# EAGLE board DoorSensor-v1.0.Tiled (EAGLE 7.0.0)
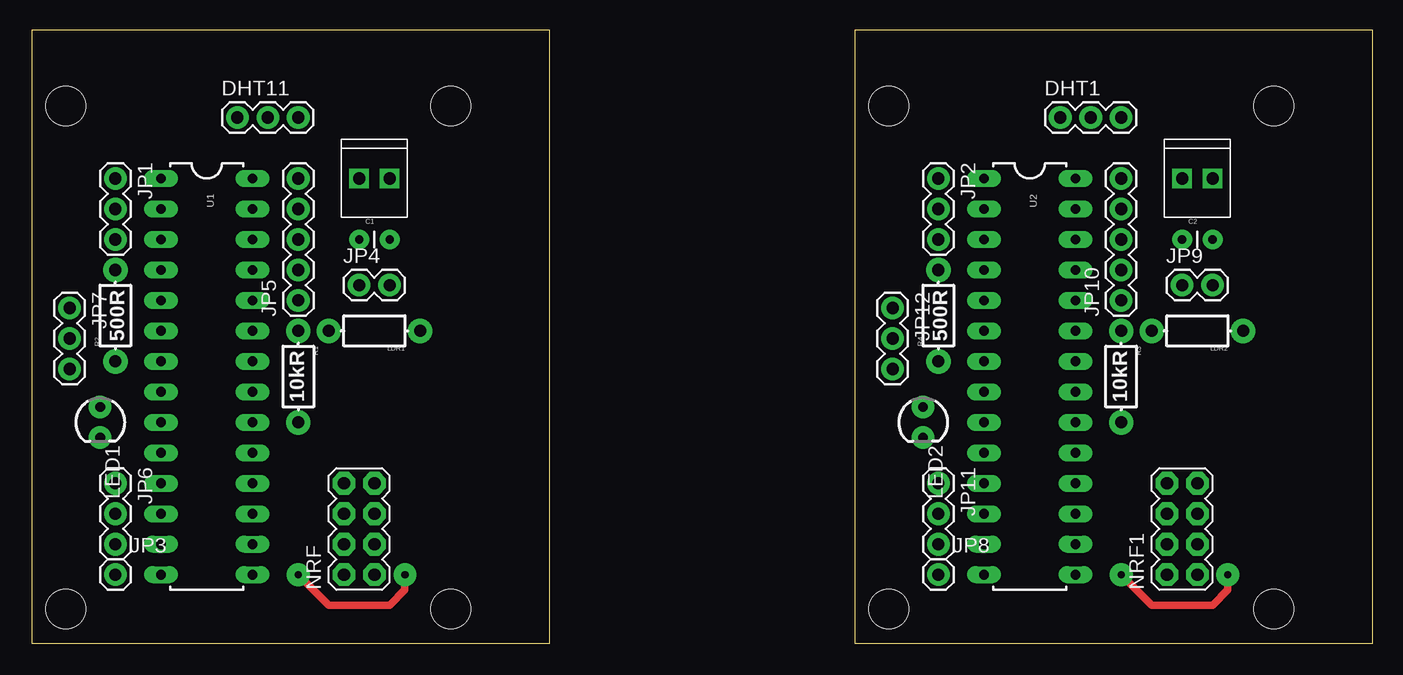
[diagram p0: board, top side]
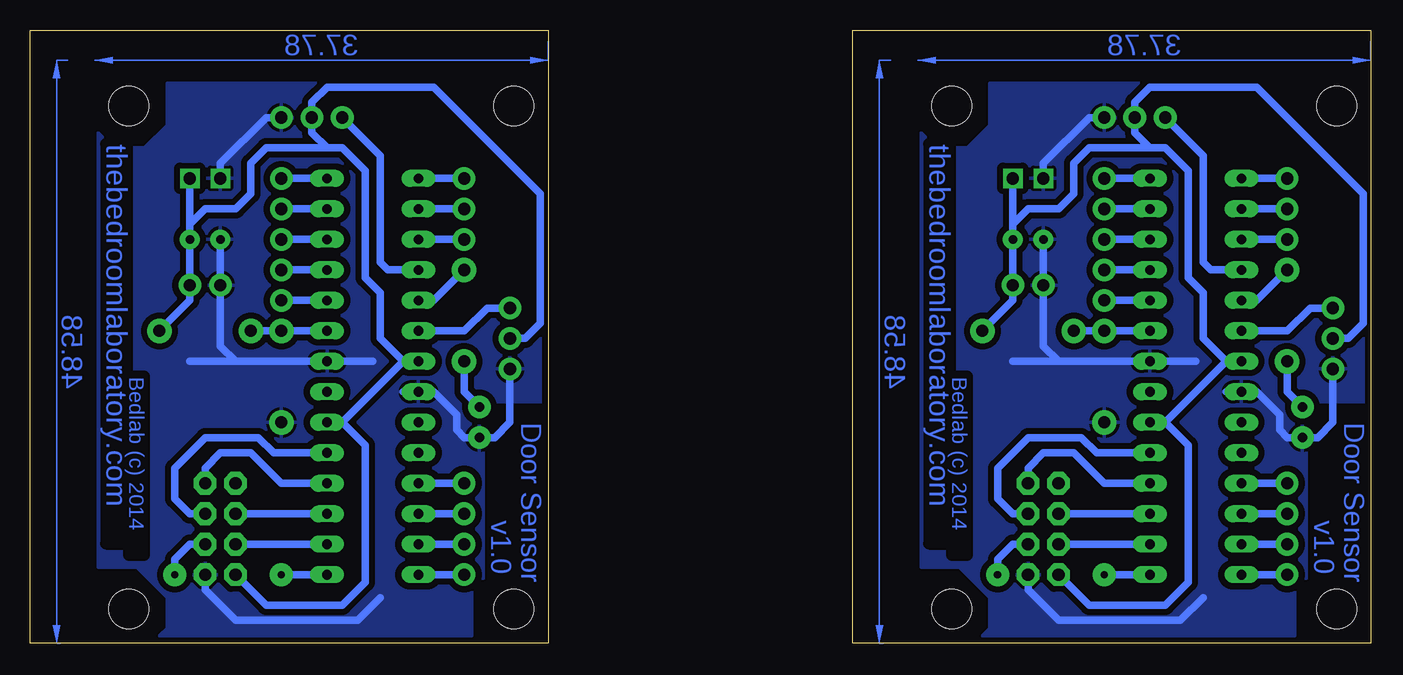
[diagram p1: board, bottom side, seen from below]

Size 111.75 x 51.11 mm. Coordinates in mm from the lower left corner, seen from the top.
Outline: 0,0 43.17,0 43.17,51.11 0,51.11 0,0
Outline: 68.58,0 111.75,0 111.75,51.11 68.58,51.11 68.58,0
Copper layers (1*16): Top 0.035mm / dielectric 1.5mm / Bottom 0.035mm
Design rules "SparkFun-Home": minimum track width 24mil, minimum drill 20mil, track to track 20mil, track to pad 20mil, pad to pad 20mil, via to via 20mil, smd to smd 8mil, copper to edge 10mil, drill to drill 8mil, minimum pad ring 12mil, minimum via ring 10mil, stop-mask expansion 4mil, vias tented up to drill 25mil, thermal gap 10mil

## Footprints (pad centres in the part's own frame; a part is rotated, then mirrored left to right if it is on the bottom)
CAP-PTH-SMALL = drill 0.7 pad 1.651: 1 0,0; 2 2.54,0
1X03 = drill 1.016 pad 1.88: 1 0,0; 2 2.54,0; 3 5.08,0
1X01 = drill 1.016 pad 1.88: 1 0,0
1X02 = drill 1.016 pad 1.88: 1 0,0; 2 2.54,0
1X05 = drill 1.016 pad 1.88: 1 0,0; 2 2.54,0; 3 5.08,0; 4 7.62,0; 5 10.16,0
AXIAL-0.3-KIT = drill 1.016 pad 2.032: P$1 -3.81,0; P$2 3.81,0
LED3MM = drill 0.813 pad 1.88: A -1.27,0; K 1.27,0
2X4 = drill 1.016 pad 1.88 octagon: 1 -3.81,-1.27; 2 -3.81,1.27; 3 -1.27,-1.27; 4 -1.27,1.27; 5 1.27,-1.27; 6 1.27,1.27; 7 3.81,-1.27; 8 3.81,1.27
1X02_2.54_SCREWTERM = drill 1.016 square: P1 2.54,0; P2 0,0
DIL28-3 = drill 0.813 long: 1 -16.51,-3.81; 2 -13.97,-3.81; 3 -11.43,-3.81; 4 -8.89,-3.81; 5 -6.35,-3.81; 6 -3.81,-3.81; 7 -1.27,-3.81; 8 1.27,-3.81; 9 3.81,-3.81; 10 6.35,-3.81; 11 8.89,-3.81; 12 11.43,-3.81; 13 13.97,-3.81; 14 16.51,-3.81; 15 16.51,3.81; 16 13.97,3.81; 17 11.43,3.81; 18 8.89,3.81; 19 6.35,3.81; 20 3.81,3.81; 21 1.27,3.81; 22 -1.27,3.81; 23 -3.81,3.81; 24 -6.35,3.81; 25 -8.89,3.81; 26 -11.43,3.81; 27 -13.97,3.81; 28 -16.51,3.81
STAND-OFF = hole 3.302: 0,0

## Placement (x,y rotation side)
C1  1uF  [CAP-PTH-SMALL]  27.3,33.66 0 top
C2  1uF  [CAP-PTH-SMALL]  95.89,33.66 0 top
DHT1  [1X03]  85.72,43.81 0 top
DHT11  [1X03]  17.14,43.81 0 top
JP1  [1X03]  6.99,38.73 270 top
JP2  [1X03]  75.56,38.73 270 top
JP3  M01PTH  [1X01]  6.99,5.71 0 top
JP4  M02PTH  [1X02]  27.3,29.84 0 top
JP5  [1X05]  22.23,28.57 90 top
JP6  [1X03]  6.99,13.34 270 top
JP7  [1X03]  3.17,27.94 270 top
JP8  M01PTH  [1X01]  75.56,5.71 0 top
JP9  M02PTH  [1X02]  95.89,29.84 0 top
JP10  [1X05]  90.81,28.57 90 top
JP11  [1X03]  75.56,13.34 270 top
JP12  [1X03]  71.75,27.94 270 top
LDR1  [AXIAL-0.3-KIT]  28.57,26.04 180 top
LDR2  [AXIAL-0.3-KIT]  97.16,26.04 180 top
LED1  [LED3MM]  5.71,18.41 270 top
LED2  [LED3MM]  74.3,18.41 270 top
NRF  M04X2  [2X4]  27.3,9.53 90 top
NRF1  M04X2  [2X4]  95.89,9.53 90 top
POWER  M022.54MM_SCREWTERM  [1X02_2.54_SCREWTERM]  27.3,38.73 0 top
POWER1  M022.54MM_SCREWTERM  [1X02_2.54_SCREWTERM]  95.89,38.73 0 top
R1  10kR  [AXIAL-0.3-KIT]  22.23,22.23 270 top
R2  500R  [AXIAL-0.3-KIT]  6.99,27.3 90 top
R3  10kR  [AXIAL-0.3-KIT]  90.81,22.23 270 top
R4  500R  [AXIAL-0.3-KIT]  75.56,27.3 90 top
U1  ATMEGA328P_PDIP  [DIL28-3]  14.61,22.23 270 top
U2  ATMEGA328P_PDIP  [DIL28-3]  83.19,22.23 270 top
U$1  [STAND-OFF]  34.92,44.77 0 top
U$2  [STAND-OFF]  2.86,44.77 0 top
U$3  [STAND-OFF]  2.86,2.86 0 top
U$4  [STAND-OFF]  34.92,2.86 0 top
U$5  [STAND-OFF]  103.5,44.77 0 top
U$6  [STAND-OFF]  71.44,44.77 0 top
U$7  [STAND-OFF]  71.44,2.86 0 top
U$8  [STAND-OFF]  103.5,2.86 0 top

## Library data of the parts
C1 C2 LDR1 LDR2 R1-R4 = SparkFun-Passives
DHT1 DHT11 JP1-JP12 NRF NRF1 POWER POWER1 = SparkFun-Connectors
LED1 LED2 = SparkFun-LED
U1 U2 = SparkFun-DigitalIC
U$1-U$8 = SparkFun-Electromechanical

## Nets
A1: JP5.1 U1.24
A2: JP5.2 U1.25
A3: JP5.3 U1.26
A4: JP5.4 U1.27
A5: JP5.5 U1.28
A6: JP10.1 U2.24
A7: JP10.2 U2.25
A8: JP10.3 U2.26
A9: JP10.4 U2.27
A10: JP10.5 U2.28
D1: JP8.1 U2.14
D2: JP12.1 U2.6
D3: JP11.1 U2.11
D4: JP7.1 U1.6
D5: JP6.1 U1.11
D6: JP6.2 U1.12
D7: JP6.3 U1.13
D8: JP3.1 U1.14
D9: JP11.2 U2.12
D10: JP11.3 U2.13
GND: C1.1 DHT11.3 JP4.1 JP7.3 LED1.K NRF.1 POWER.P2 R1.P$2 U1.8 U1.22
GND1: C2.1 DHT1.3 JP9.1 JP12.3 LED2.K NRF1.1 POWER1.P2 R3.P$2 U2.8 U2.22
N$1: LDR1.P$2 R1.P$1 U1.23
N$2: LED1.A R2.P$1
N$3: DHT11.1 U1.4
N$4: R2.P$2 U1.5
N$5: NRF.3 U1.15
N$6: NRF.4 U1.16
N$7: NRF.5 U1.19
N$8: LDR2.P$2 R3.P$1 U2.23
N$9: NRF.7 U1.18
N$10: NRF.6 U1.17
N$11: LED2.A R4.P$1
N$12: R4.P$2 U2.5
N$13: NRF1.3 U2.15
N$14: NRF1.4 U2.16
N$15: NRF1.5 U2.19
N$16: NRF1.7 U2.18
N$17: NRF1.6 U2.17
N$18: DHT1.1 U2.4
RESET: JP1.1 U1.1
RESET1: JP2.1 U2.1
RX: JP1.2 U1.2
RX1: JP2.2 U2.2
TX: JP1.3 U1.3
TX1: JP2.3 U2.3
VCC: C1.2 DHT11.2 JP4.2 JP7.2 LDR1.P$1 NRF.2 POWER.P1 U1.7 U1.20
VCC1: C2.2 DHT1.2 JP9.2 JP12.2 LDR2.P$1 NRF1.2 POWER1.P1 U2.7 U2.20

## Tracks (layer width: path | path; a pad name or v marks a point on that pad's centre or on a via)
A1
  Bottom 0.61: U1.24 JP5.1
A2
  Bottom 0.61: U1.25 JP5.2
A3
  Bottom 0.61: U1.26 JP5.3
A4
  Bottom 0.61: U1.27 JP5.4
A5
  Bottom 0.61: U1.28 JP5.5
A6
  Bottom 0.61: U2.24 JP10.1
A7
  Bottom 0.61: U2.25 JP10.2
A8
  Bottom 0.61: U2.26 JP10.3
A9
  Bottom 0.61: U2.27 JP10.4
A10
  Bottom 0.61: U2.28 JP10.5
D1
  Bottom 0.61: JP8.1 U2.14
D2
  Bottom 0.61: JP12.1 73.66,27.94 75.56,26.04 U2.6
D3
  Bottom 0.61: JP11.1 U2.11
D4
  Bottom 0.61: JP7.1 5.08,27.94 6.99,26.04 U1.6
D5
  Bottom 0.61: JP6.1 U1.11
D6
  Bottom 0.61: JP6.2 U1.12
D7
  Bottom 0.61: JP6.3 U1.13
D8
  Bottom 0.61: JP3.1 U1.14
D9
  Bottom 0.61: JP11.2 U2.12
D10
  Bottom 0.61: JP11.3 U2.13
GND
  Bottom 0.61: C1.1 JP4.1 27.3,24.77 26.04,23.5 | 26.04,23.5 U1.22 14.61,23.5 | 29.84,23.5 26.04,23.5 | POWER.P2 27.3,40.01 23.5,43.81 DHT11.3 | 13.97,3.81 15.88,1.91 26.04,1.91 28.57,4.45 NRF.1 | 12.06,20.95 U1.8 9.53,20.95 7.62,19.05 7.62,17.78 6.99,17.14 LED1.K 4.45,17.14 3.17,18.41 JP7.3
  pour Bottom: 5.71,46.67 6.35,46.35 6.35,43.81 3.81,41.27 0.64,41.27 0.64,5.71 1.27,6.35 4.45,6.35 6.35,4.45 6.35,0.64 32.38,0.64 31.75,1.27 31.75,3.81 34.29,6.35 37.47,6.35 37.47,42.55 36.2,41.27 33.66,41.27 31.75,43.18 31.75,46.67
GND1
  Bottom 0.61: C2.1 JP9.1 95.89,24.77 94.61,23.5 | 94.61,23.5 U2.22 83.19,23.5 | 98.42,23.5 94.61,23.5 | POWER1.P2 95.89,40.01 92.08,43.81 DHT1.3 | 82.55,3.81 84.45,1.91 94.61,1.91 97.16,4.45 NRF1.1 | 80.64,20.95 U2.8 78.11,20.95 76.2,19.05 76.2,17.78 75.56,17.14 LED2.K 73.03,17.14 71.75,18.41 JP12.3
  pour Bottom: 74.3,46.67 74.93,46.35 74.93,43.81 72.39,41.27 69.22,41.27 69.22,5.71 69.85,6.35 73.03,6.35 74.93,4.45 74.93,0.64 100.97,0.64 100.33,1.27 100.33,3.81 102.87,6.35 106.05,6.35 106.05,42.55 104.78,41.27 102.23,41.27 100.33,43.18 100.33,46.67
N$1
  Bottom 0.61: U1.23 R1.P$1 LDR1.P$2
N$2
  Bottom 0.61: LED1.A 6.99,20.95 R2.P$1
N$3
  Bottom 0.61: U1.4 13.34,31.11 13.97,31.75 13.97,40.64 DHT11.1
N$4
  Bottom 0.61: R2.P$2 9.53,28.57 U1.5
N$5  (via drill 0.6 pad 1.91)
  Top 0.61: v22.23,5.71 24.77,3.17 29.84,3.17 31.11,4.45 v31.11,5.71
  Bottom 0.61: U1.15 v22.23,5.71 | NRF.3 29.84,8.26 31.11,6.99 v31.11,5.71
N$6
  Bottom 0.61: U1.16 NRF.4
N$7
  Bottom 0.61: NRF.5 29.84,10.79 31.11,12.06 31.11,14.61 28.57,17.14 24.13,17.14 22.86,15.88 U1.19
N$8
  Bottom 0.61: U2.23 R3.P$1 LDR2.P$2
N$9
  Bottom 0.61: U1.18 22.23,13.34 24.77,15.88 27.3,15.88 28.57,14.61 NRF.7
N$10
  Bottom 0.61: U1.17 NRF.6
N$11
  Bottom 0.61: LED2.A 75.56,20.95 R4.P$1
N$12
  Bottom 0.61: R4.P$2 78.11,28.57 U2.5
N$13  (via drill 0.6 pad 1.91)
  Top 0.61: v90.81,5.71 93.34,3.17 98.42,3.17 99.69,4.45 v99.69,5.71
  Bottom 0.61: U2.15 v90.81,5.71 | NRF1.3 98.42,8.26 99.69,6.99 v99.69,5.71
N$14
  Bottom 0.61: U2.16 NRF1.4
N$15
  Bottom 0.61: NRF1.5 98.42,10.79 99.69,12.06 99.69,14.61 97.16,17.14 92.71,17.14 91.44,15.88 U2.19
N$16
  Bottom 0.61: U2.18 90.81,13.34 93.34,15.88 95.89,15.88 97.16,14.61 NRF1.7
N$17
  Bottom 0.61: U2.17 NRF1.6
N$18
  Bottom 0.61: U2.4 81.92,31.11 82.55,31.75 82.55,40.64 DHT1.1
RESET
  Bottom 0.61: JP1.1 U1.1
RESET1
  Bottom 0.61: JP2.1 U2.1
RX
  Bottom 0.61: JP1.2 U1.2
RX1
  Bottom 0.61: JP2.2 U2.2
TX
  Bottom 0.61: JP1.3 U1.3
TX1
  Bottom 0.61: JP2.3 U2.3
VCC
  Bottom 0.61: U1.7 12.06,23.5 | 18.41,41.27 17.14,41.27 15.24,39.37 15.24,30.48 13.97,29.21 13.97,25.4 12.06,23.5 | 18.41,41.27 19.68,42.55 DHT11.2 19.68,45.09 18.41,46.35 9.53,46.35 0.64,37.47 0.64,26.67 1.91,25.4 JP7.2 | NRF.2 23.5,3.17 17.14,3.17 15.24,5.08 15.24,16.51 17.14,18.41 | 29.84,34.92 C1.2 JP4.2 29.84,28.57 LDR1.P$1 | POWER.P1 29.84,34.92 | 29.84,34.92 28.57,36.2 26.04,36.2 24.77,37.47 24.77,40.01 23.5,41.27 18.41,41.27 | 12.06,23.5 17.14,18.41 | 17.14,18.41 U1.20
VCC1
  Bottom 0.61: U2.7 80.64,23.5 | 87,41.27 85.72,41.27 83.82,39.37 83.82,30.48 82.55,29.21 82.55,25.4 80.64,23.5 | 87,41.27 88.27,42.55 DHT1.2 88.27,45.09 87,46.35 78.11,46.35 69.22,37.47 69.22,26.67 70.48,25.4 JP12.2 | NRF1.2 92.08,3.17 85.72,3.17 83.82,5.08 83.82,16.51 85.72,18.41 | 98.42,34.92 C2.2 JP9.2 98.42,28.57 LDR2.P$1 | POWER1.P1 98.42,34.92 | 98.42,34.92 97.16,36.2 94.61,36.2 93.34,37.47 93.34,40.01 92.08,41.27 87,41.27 | 80.64,23.5 85.72,18.41 | 85.72,18.41 U2.20
(copper drawn outside any net)
  shapes: Bottom area x4

## Text on the board
Bottom: thebedroomlaboratory.com | thebedroomlaboratory.com | Bedlab (c) 2014 | Bedlab (c) 2014 | Door Sensor / v1.0 | Door Sensor / v1.0